# Altium PCB PCB1.PcbDoc
Units mil, origin at the board's own origin, x right, y up, seen from the top; angles counter-clockwise.
Board outline 6000 x 4000 mil, 6 copper layers (Top Layer, GND, SRAM_Bus, Power, GND_2, Bottom Layer), stack 28.052 mil thick; 52 components, 120 nets, 722 pads, 84 vias.
Unrouted connection lines stored in the file: 32.
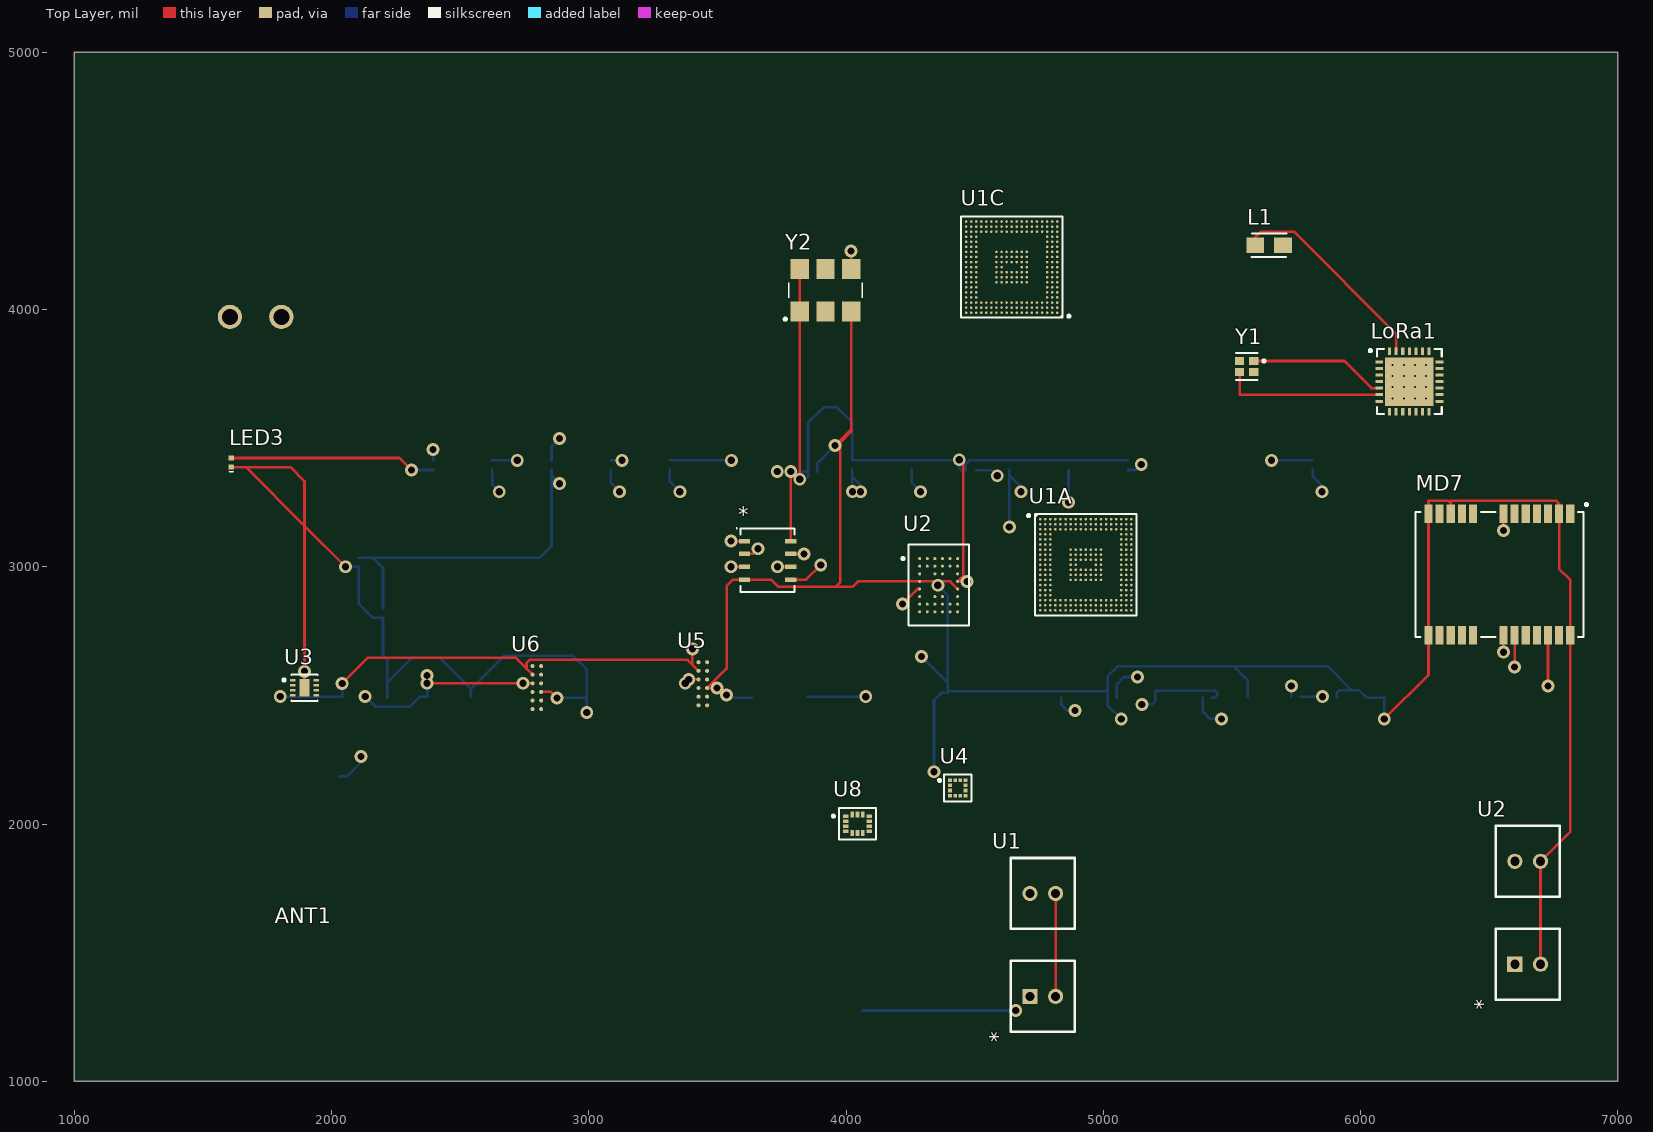
[diagram p0: Top Layer view]
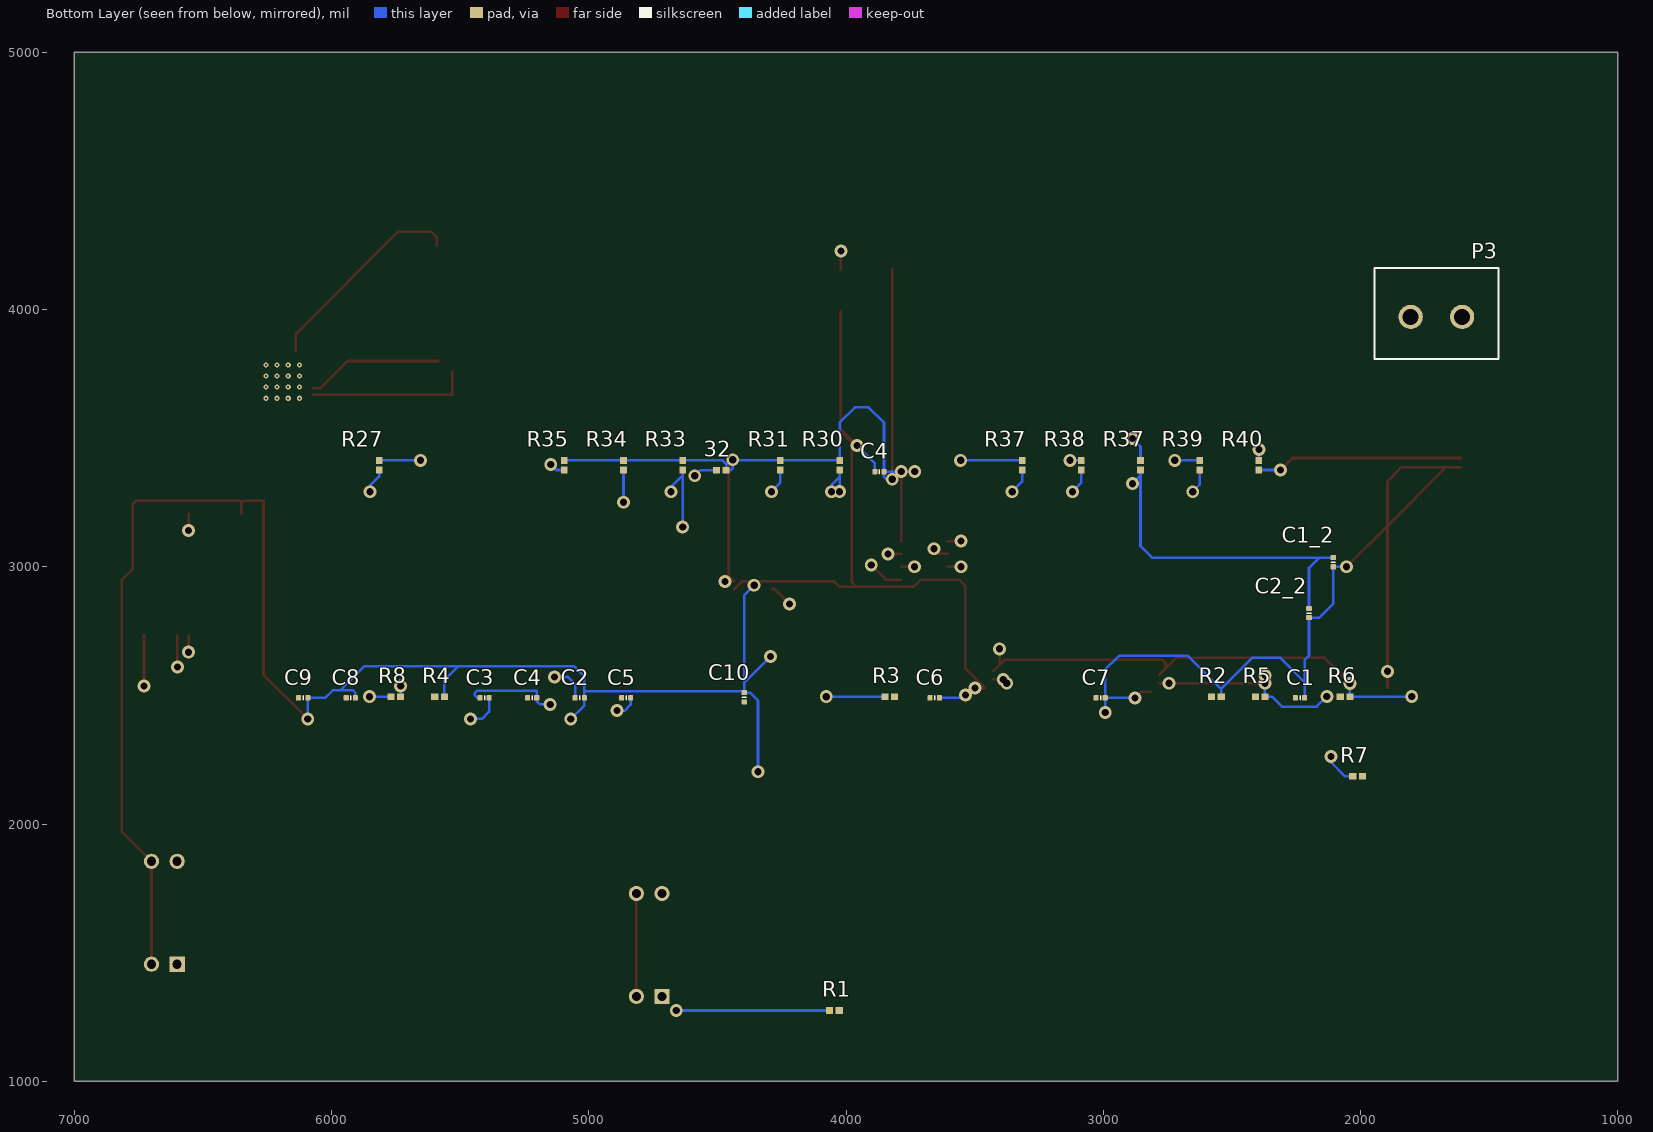
[diagram p1: Bottom Layer view, seen from below]
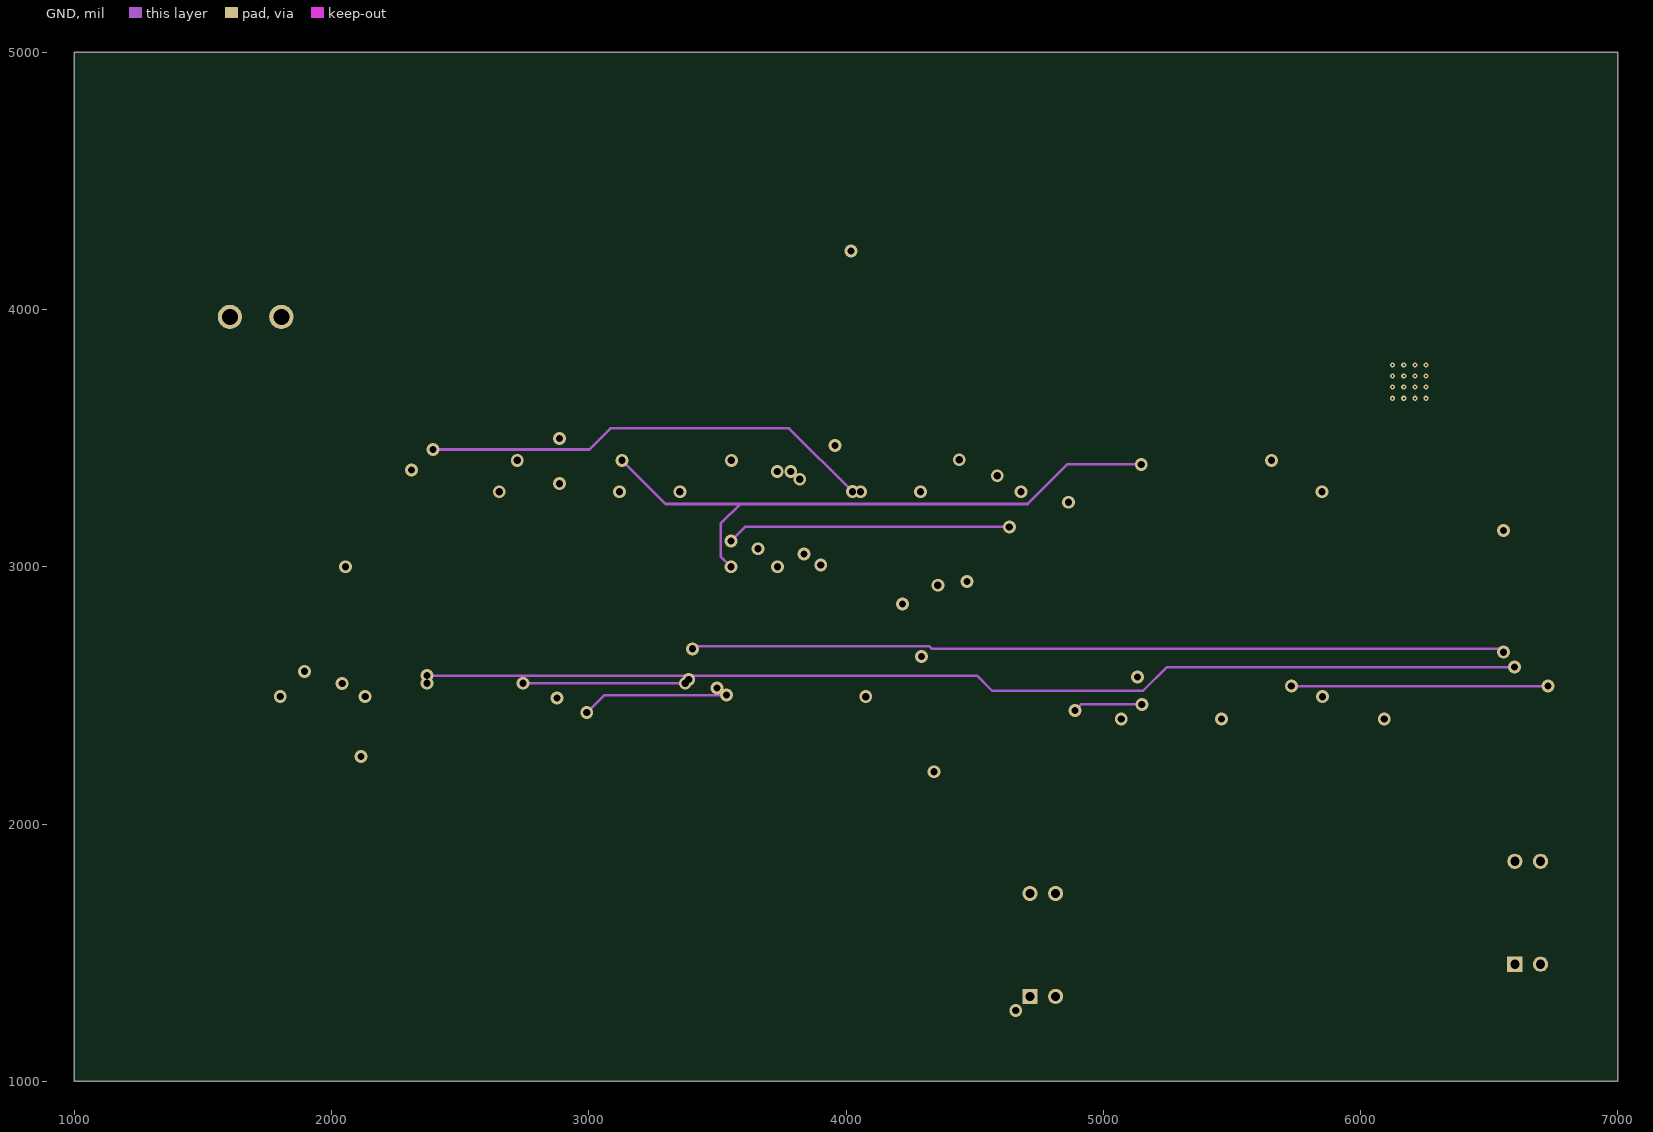
[diagram p2: GND]
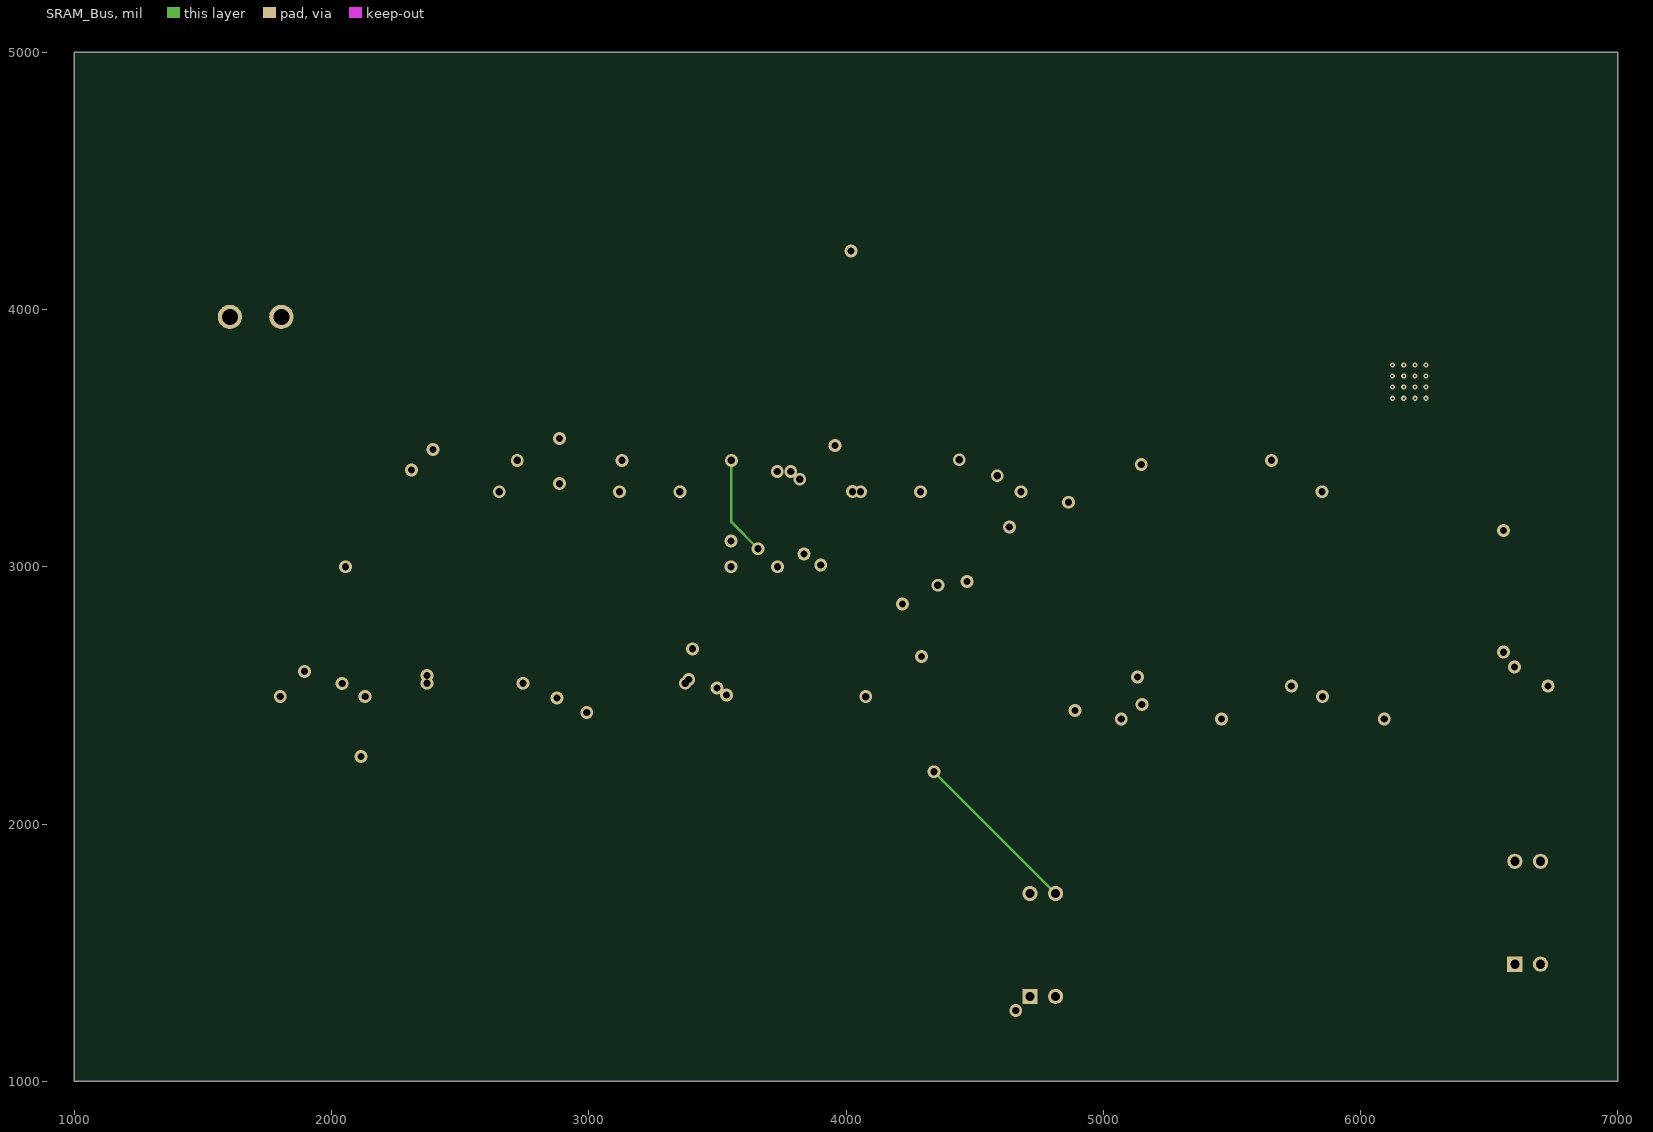
[diagram p3: SRAM_Bus]
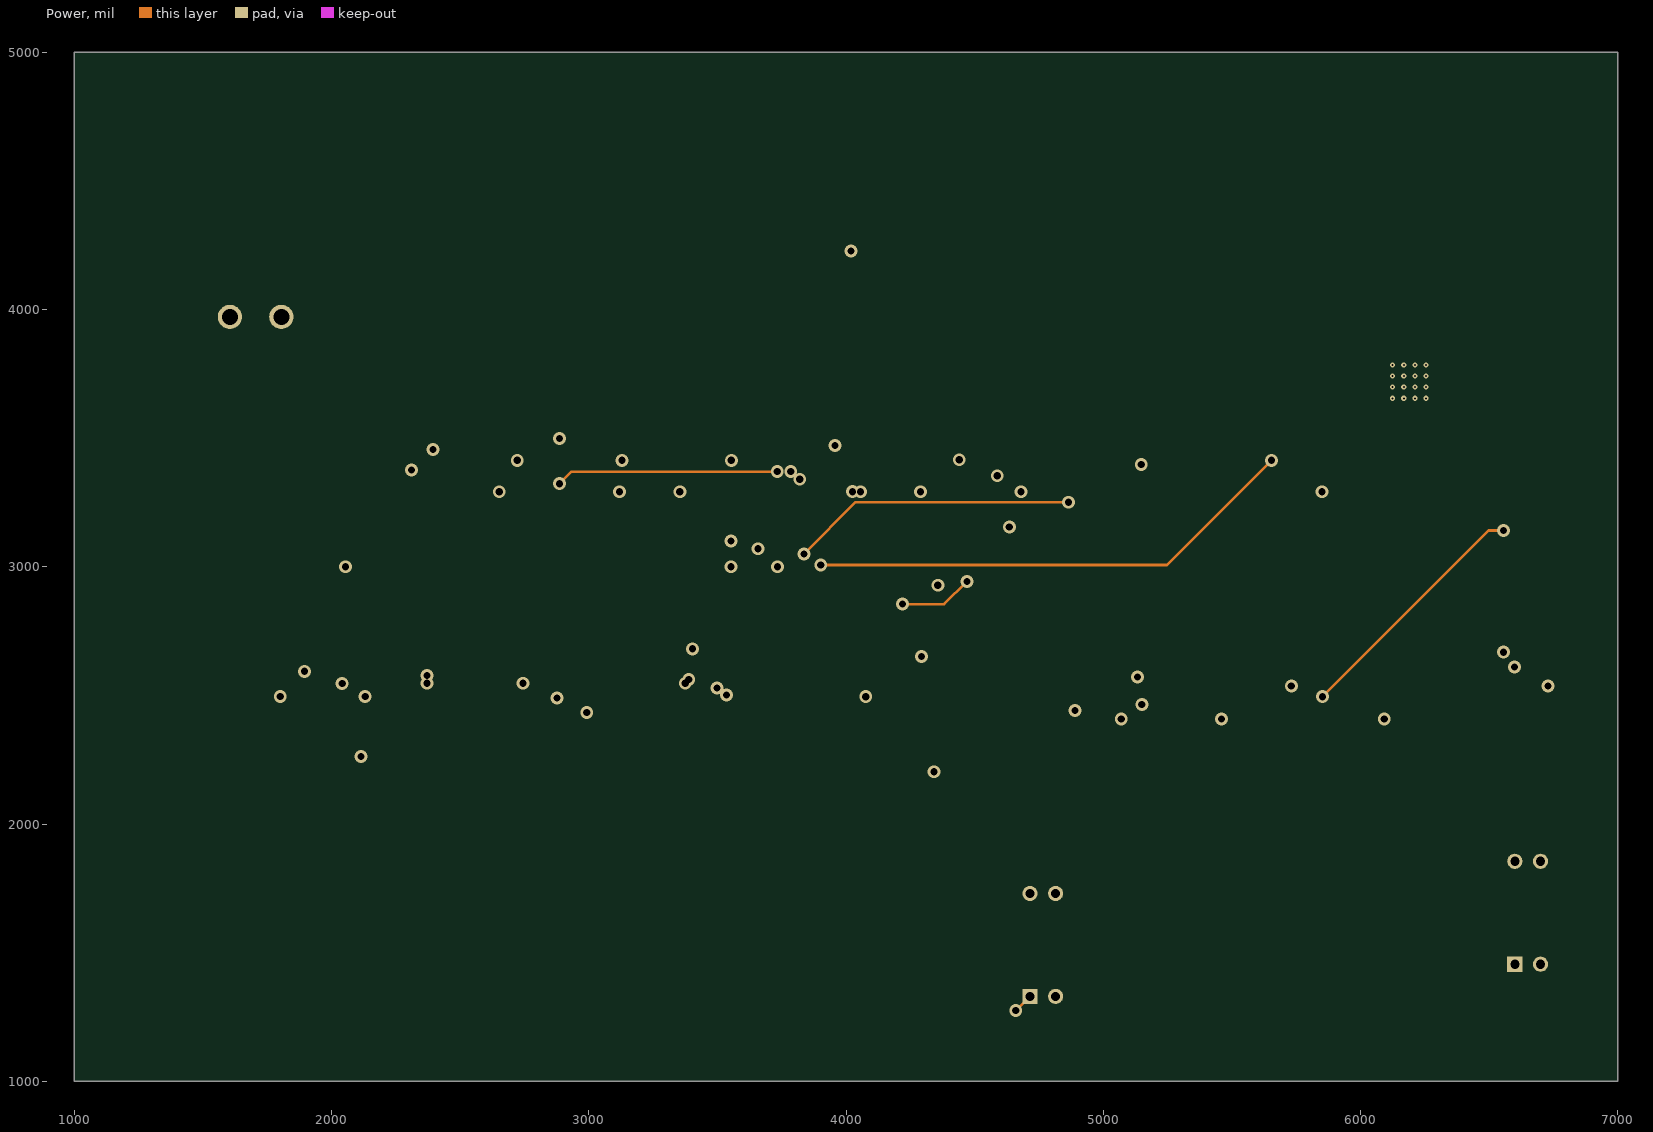
[diagram p4: Power]
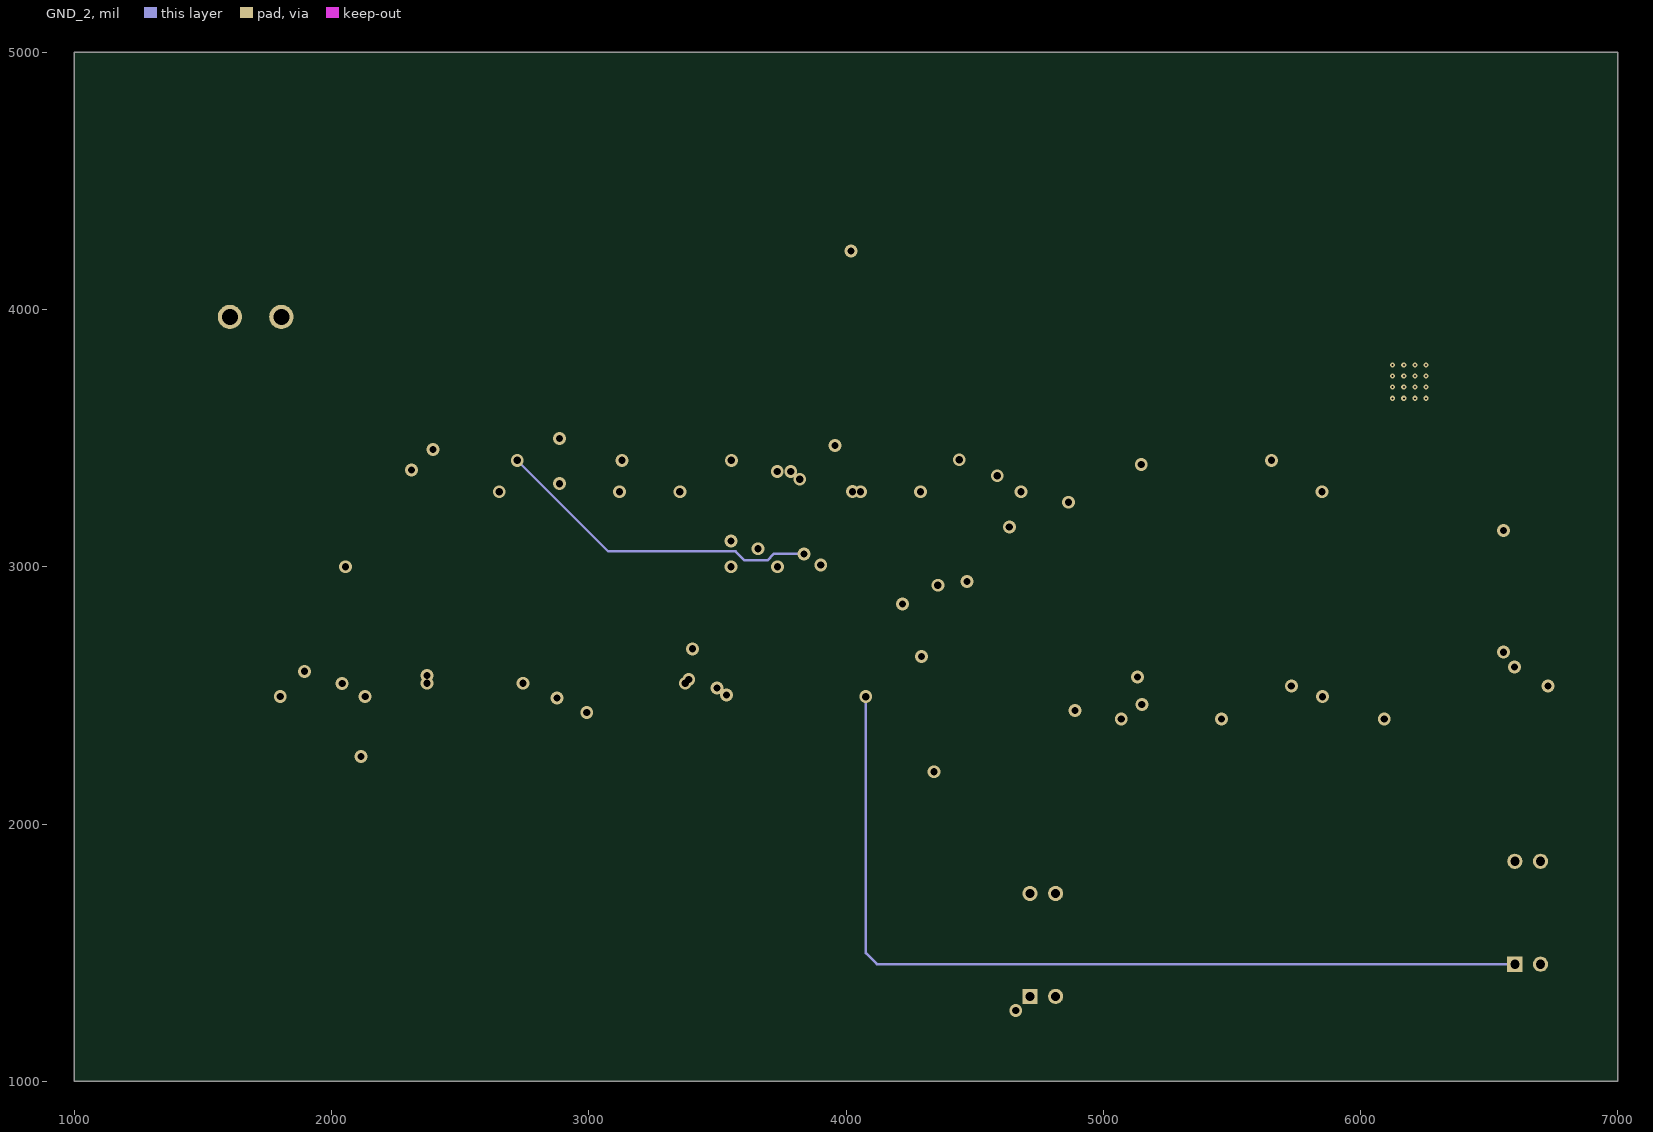
[diagram p5: GND_2]
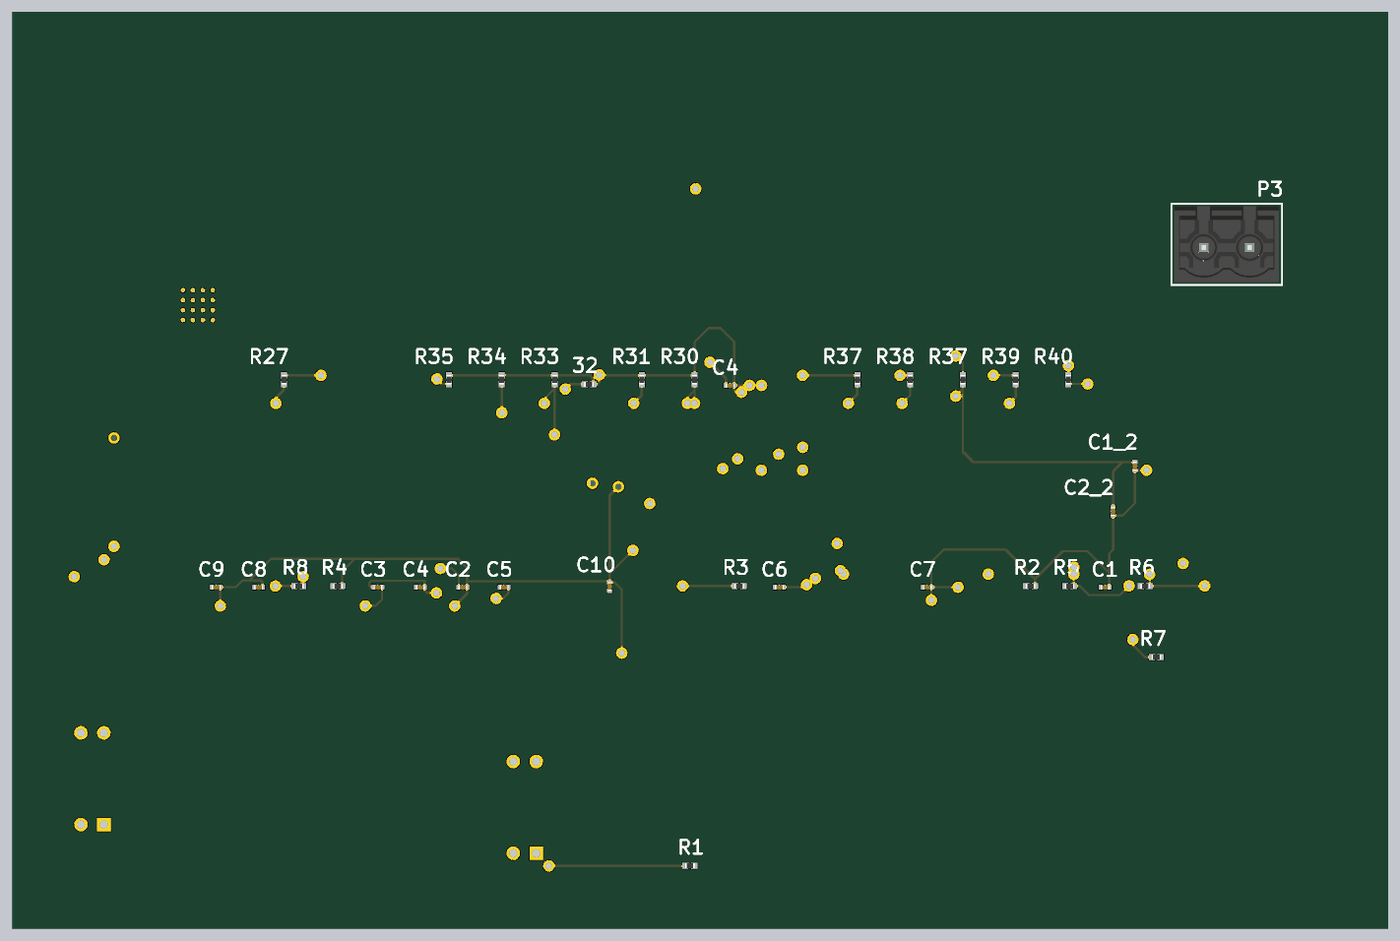
[diagram p6: 3D render of the assembled board from below, using the file's embedded part models]

## Layer stack, top to bottom
Top Solder: solder mask 0.4, Solder Resist, Dk 3.5
Top Layer: signal copper 0.7087
Dielectric 4: prepreg 2.8, FR-4, Dk 4.1
GND: signal copper 0.7087
Dielectric 2: prepreg 2.8, FR-4, Dk 4.1
SRAM_Bus: signal copper 0.7087
Dielectric 1: dielectric 12.6, FR-4, Dk 4.8
Power: signal copper 0.7087
Dielectric 3: prepreg 2.8, FR-4, Dk 4.1
GND_2: signal copper 0.7087
Dielectric 5: prepreg 2.8, FR-4, Dk 4.1
Bottom Layer: signal copper 0.7087
Bottom Solder: solder mask 0.4, Solder Resist, Dk 3.5

## Board outline
1000,1000 7000,1000 7000,5000 1000,5000

## Design rules (kind name [scope] priority, off if disabled: settings)
Clearance [All] p1: gap=10 ignorepadtopadclearanceinfootprint=FALSE
PolygonConnect [All] p1: connectstyle=Relief reliefconductorwidth=10 reliefentries=4 polygonreliefangle="90 Angle" airgapwidth=10
RoutingVias [All] p1: holewidth=28 width=50 viastyle="Through Hole" minholewidth=28 minwidth=50 maxholewidth=28 maxwidth=50
SolderMaskExpansion [All] p1: expansion=4 istentingtop=FALSE
SupplyNets "Schematic Supply Nets_5" [InNet('VCC3V3')] p1: voltage=0.000
SupplyNets "Schematic Supply Nets_4" [InNet('XADCGND')] p2: voltage=0.000
SupplyNets "Schematic Supply Nets_3" [InNet('VCC')] p3: voltage=0.000
SupplyNets "Schematic Supply Nets_2" [InNet('VCC_IO')] p4: voltage=0.000
SupplyNets "Schematic Supply Nets_1" [InNet('GND')] p5: voltage=0.000
SupplyNets "Schematic Supply Nets" [InNet('VCC3V3')] p6: voltage=0.000
Width [All] p1: maxlimit=10 minlimit=10 preferedwidth=10
30 further rules are at their usual default settings.

## Classes and differential pairs
component class Main_TopSheet: Y2
component class Designator: C15 C16 C17 C18 D1 D2 D3 D4 D5 D6 D7 P1 P2 P3 P4 P5 P6 R10 R11 R12 R13 R14 U9 U10

## Components (designator, comment, footprint, x,y, rotation, side; value= is the part's Value field where it differs from the comment)
32 "Resistor 51k +/-5% 0402 63 mW" RESC1005X40X25ML05T10 4485,3375 r180 bottom value=4.7K
* "MX25L3233FZBI-08GTR" SON127P500X80_HS-9N 3695,3025 r0 top
ANT1 "RN-SMA-4" FP-RN-SMA-4-MFG 1975,1380 r0 top (schematic designator ANT?)
C1 "Capacitor 100nF +/-20% 10V 0402" CAPC0402(1005)60_L 2235,2490 r180 bottom value=100nF
C1_2 "Capacitor 100nF +/-20% 10V 0402" CAPC0402(1005)60_L 2105,3017.72 r90 bottom value=100nF
C2 "Capacitor 100nF +/-20% 10V 0402" CAPC0402(1005)60_L 5035,2490 r180 bottom value=220nF
C2_2 "Capacitor 100nF +/-20% 10V 0402" CAPC0402(1005)60_L 2200,2820 r90 bottom value=100nF
C3 "Capacitor 100nF +/-20% 10V 0402" CAPC0402(1005)60_L 5405,2490 r180 bottom value=100nF
C4 "Capacitor 100nF +/-20% 10V 0402" CAPC0402(1005)60_L 5220,2490 r180 bottom value=10uF
C4 "Capacitor 100nF +/-20% 10V 0402" CAPC0402(1005)60_L 3870,3370 r180 bottom value=100nF
C5 "Capacitor 100nF +/-20% 10V 0402" CAPC0402(1005)60_L 4855,2490 r180 bottom value=100nF
C6 "Capacitor 100nF +/-20% 10V 0402" CAPC0402(1005)60_L 3655,2490 r180 bottom value=100nF
C7 "Capacitor 100nF +/-20% 10V 0402" CAPC0402(1005)60_L 3010,2490 r180 bottom value=100nF
C8 "Capacitor 100nF +/-20% 10V 0402" CAPC0402(1005)60_L 5925,2490 r180 bottom value=100nF
C9 "Capacitor 100nF +/-20% 10V 0402" CAPC0402(1005)60_L 6110,2490 r180 bottom value=100nF
C10 "Capacitor 100nF +/-20% 10V 0402" CAPC0402(1005)60_L 4395,2492.72 r90 bottom value=100nF
L1 "LQW31HN27NJ03L" FP-LQW31HN_03-MFG 5645,4250 r0 top
LED3 "QBLP595-IB" QTB-QBLP595_V 1610,3405 r90 top
LoRa1 "SX1276IMLTRT" SMTC-QFN-28_V 6190,3720 r0 top
MD7 "NEO-M9N-00B" FP-NEO-M9N-00B-MFG 6540,2970 r0 top
P3 "691701510002B" 691701510002B 1705,3985 r180 bottom
R1 "Resistor 51k +/-5% 0402 63 mW" RESC1005X40X25ML05T10 4045,1275 r180 bottom value=220
R2 "Resistor 51k +/-5% 0402 63 mW" RESC1005X40X25ML05T10 2560,2495 r180 bottom value=4.7K
R3 "Resistor 51k +/-5% 0402 63 mW" RESC1005X40X25ML05T10 3830,2495 r180 bottom value=220
R4 "Resistor 51k +/-5% 0402 63 mW" RESC1005X40X25ML05T10 5580,2495 r180 bottom value=4.7K
R5 "Resistor 51k +/-5% 0402 63 mW" RESC1005X40X25ML05T10 2390,2495 r180 bottom value=4.7K
R6 "Resistor 51k +/-5% 0402 63 mW" RESC1005X40X25ML05T10 2060,2495 r180 bottom value=4.7K
R7 "Resistor 51k +/-5% 0402 63 mW" RESC1005X40X25ML05T10 2011.3,2185 r180 bottom value=10K
R8 "Resistor 51k +/-5% 0402 63 mW" RESC1005X40X25ML05T10 5750,2495 r180 bottom value=220
R27 "Resistor 51k +/-5% 0402 63 mW" RESC1005X40X25ML05T10 5815,3395 r90 bottom value=100
R30 "Resistor 51k +/-5% 0402 63 mW" RESC1005X40X25ML05T10 4025,3395 r90 bottom value=200
R31 "Resistor 51k +/-5% 0402 63 mW" RESC1005X40X25ML05T10 4255,3395 r90 bottom value=4.7K
R33 "Resistor 51k +/-5% 0402 63 mW" RESC1005X40X25ML05T10 4635,3395 r90 bottom value=4.7K
R34 "Resistor 51k +/-5% 0402 63 mW" RESC1005X40X25ML05T10 4865,3395 r90 bottom value=1.8K
R35 "Resistor 51k +/-5% 0402 63 mW" RESC1005X40X25ML05T10 5095,3395 r90 bottom value=1.8K
R37 "Resistor 51k +/-5% 0402 63 mW" RESC1005X40X25ML05T10 3315,3395 r90 bottom value=100
R37 "Resistor 51k +/-5% 0402 63 mW" RESC1005X40X25ML05T10 2855,3395 r90 bottom value=4.7K
R38 "Resistor 51k +/-5% 0402 63 mW" RESC1005X40X25ML05T10 3085,3395 r90 bottom value=100
R39 "Resistor 51k +/-5% 0402 63 mW" RESC1005X40X25ML05T10 2625,3395 r90 bottom value=100
R40 "Resistor 51k +/-5% 0402 63 mW" RESC1005X40X25ML05T10 2395,3395 r90 bottom value=100
U1 "TCST2103" TCST2103-Footprint-1 4889.02,1192.2 r90 top
U1A "XC7A35T-1CPG236C" BGA81C50P19X19_1000X1000X110 4932.2,3007.8 r0 top
U1C "XC7A35T-1CPG236C" BGA81C50P19X19_1000X1000X110 4644.06,4165 r180 top
U2 "IS61WV5128BLL-10BLI" FP-IS61WV5128BLL-10BLI-IPC_A 4360.24,2928.35 r0 top
U2 "TCST2103" TCST2103-Footprint-1 6774.02,1317.2 r90 top
U3 "SHT30-DIS-B2.5KS" FP-SHT30-DIS-B2_5KS-MFG 1895,2530 r0 top
U4 "LSM303AGRTR" FP-LGA-12-8487206-MFG 4434.84,2140.02 r0 top
U5 "MPRLS0030PA00001A" LGA12C85P2X6_500X500X150 3443.27,2545.2 r0 top
U6 "MPRLS0030PA00001A" LGA12C85P2X6_500X500X150 2798.27,2530.2 r0 top
U8 "LSM6DSOXTR" FP-LGA-14L-DM00249496-MFG 4044.68,2000.93 r0 top
Y1 "" FP-ABM11AIG-MFG 5557.44,3778.35 r180 top
Y2 "XLH735100.000000X" JU6_MFG 3920,4075 r90 top

## Footprints (in the part's own frame and the unit in brackets; to place one, negate y for a bottom-side part, rotate by r counter-clockwise, add the part's x,y. Pads: shape width x height; smd on the part's side, far side on the other; paste and mask are expansions set on the pad)
691701510002B [mm] "THR - 5,08mm - PCB Vertical Close - 02p"
  round 2.4 hole 1.6: 1(-2.54,-0.35) 2(2.54,-0.35)
  silkscreen extent -6.13,-4.5 6.13,4.5, body extent -5.78,-4.25 5.78,4.25, height 12.1
BGA81C50P19X19_1000X1000X110 [mm] "BGA, 81-Leads, Body 10,00x10,00mmx1,10mm, Pitch 0,50mm"
  round 0.25 smd: A1(-4.5,4.5) A2(-4,4.5) A3(-3.5,4.5) A4(-3,4.5) A5(-2.5,4.5) A6(-2,4.5) A7(-1.5,4.5) A8(-1,4.5) A9(-0.5,4.5) A10(0,4.5) A11(0.5,4.5) A12(1,4.5) A13(1.5,4.5) A14(2,4.5) A15(2.5,4.5) A16(3,4.5) A17(3.5,4.5) A18(4,4.5) A19(4.5,4.5) B1(-4.5,4) B2(-4,4) B3(-3.5,4) B4(-3,4) B5(-2.5,4) B6(-2,4) B7(-1.5,4) B8(-1,4) B9(-0.5,4) B10(0,4) B11(0.5,4) B12(1,4) B13(1.5,4) B14(2,4) B15(2.5,4) B16(3,4) B17(3.5,4) B18(4,4) B19(4.5,4) C1(-4.5,3.5) C2(-4,3.5) C3(-3.5,3.5) C4(-3,3.5) C5(-2.5,3.5) C6(-2,3.5) C7(-1.5,3.5) C8(-1,3.5) C9(-0.5,3.5) C10(0,3.5) C11(0.5,3.5) C12(1,3.5) C13(1.5,3.5) C14(2,3.5) C15(2.5,3.5) C16(3,3.5) C17(3.5,3.5) C18(4,3.5) C19(4.5,3.5) D1(-4.5,3) D2(-4,3) D3(-3.5,3) D17(3.5,3) D18(4,3) D19(4.5,3) E1(-4.5,2.5) E2(-4,2.5) E3(-3.5,2.5) E17(3.5,2.5) E18(4,2.5) E19(4.5,2.5) F1(-4.5,2) F2(-4,2) F3(-3.5,2) F17(3.5,2) F18(4,2) F19(4.5,2) G1(-4.5,1.5) G2(-4,1.5) G3(-3.5,1.5) G7(-1.5,1.5) G8(-1,1.5) G9(-0.5,1.5) G10(0,1.5) G11(0.5,1.5) G12(1,1.5) G13(1.5,1.5) G17(3.5,1.5) G18(4,1.5) G19(4.5,1.5) H1(-4.5,1) H2(-4,1) H3(-3.5,1) H7(-1.5,1) H8(-1,1) H9(-0.5,1) H10(0,1) H11(0.5,1) H12(1,1) H13(1.5,1) H17(3.5,1) H18(4,1) H19(4.5,1) J1(-4.5,0.5) J2(-4,0.5) J3(-3.5,0.5) J7(-1.5,0.5) J8(-1,0.5) J9(-0.5,0.5) J10(0,0.5) J11(0.5,0.5) J12(1,0.5) J13(1.5,0.5) J17(3.5,0.5) J18(4,0.5) J19(4.5,0.5) K1(-4.5,0) K2(-4,0) K3(-3.5,0) K7(-1.5,0) K8(-1,0) K12(1,0) K13(1.5,0) K17(3.5,0) K18(4,0) K19(4.5,0) L1(-4.5,-0.5) L2(-4,-0.5) L3(-3.5,-0.5) L7(-1.5,-0.5) L8(-1,-0.5) L9(-0.5,-0.5) L10(0,-0.5) L11(0.5,-0.5) L12(1,-0.5) L13(1.5,-0.5) L17(3.5,-0.5) L18(4,-0.5) L19(4.5,-0.5) M1(-4.5,-1) M2(-4,-1) M3(-3.5,-1) M7(-1.5,-1) M8(-1,-1) M9(-0.5,-1) M10(0,-1) M11(0.5,-1) M12(1,-1) M13(1.5,-1) M17(3.5,-1) M18(4,-1) M19(4.5,-1) N1(-4.5,-1.5) N2(-4,-1.5) N3(-3.5,-1.5) N7(-1.5,-1.5) N8(-1,-1.5) N9(-0.5,-1.5) N10(0,-1.5) N11(0.5,-1.5) N12(1,-1.5) N13(1.5,-1.5) N17(3.5,-1.5) N18(4,-1.5) N19(4.5,-1.5) P1(-4.5,-2) P2(-4,-2) P3(-3.5,-2) P17(3.5,-2) P18(4,-2) P19(4.5,-2) R1(-4.5,-2.5) R2(-4,-2.5) R3(-3.5,-2.5) R17(3.5,-2.5) R18(4,-2.5) R19(4.5,-2.5) T1(-4.5,-3) T2(-4,-3) T3(-3.5,-3) T17(3.5,-3) T18(4,-3) T19(4.5,-3) U1(-4.5,-3.5) U2(-4,-3.5) U3(-3.5,-3.5) U4(-3,-3.5) U5(-2.5,-3.5) U6(-2,-3.5) U7(-1.5,-3.5) U8(-1,-3.5) U9(-0.5,-3.5) U10(0,-3.5) U11(0.5,-3.5) U12(1,-3.5) U13(1.5,-3.5) U14(2,-3.5) U15(2.5,-3.5) U16(3,-3.5) U17(3.5,-3.5) U18(4,-3.5) U19(4.5,-3.5) V1(-4.5,-4) V2(-4,-4) V3(-3.5,-4) V4(-3,-4) V5(-2.5,-4) V6(-2,-4) V7(-1.5,-4) V8(-1,-4) V9(-0.5,-4) V10(0,-4) V11(0.5,-4) V12(1,-4) V13(1.5,-4) V14(2,-4) V15(2.5,-4) V16(3,-4) V17(3.5,-4) V18(4,-4) V19(4.5,-4) W1(-4.5,-4.5) W2(-4,-4.5) W3(-3.5,-4.5) W4(-3,-4.5) W5(-2.5,-4.5) W6(-2,-4.5) W7(-1.5,-4.5) W8(-1,-4.5) W9(-0.5,-4.5) W10(0,-4.5) W11(0.5,-4.5) W12(1,-4.5) W13(1.5,-4.5) W14(2,-4.5) W15(2.5,-4.5) W16(3,-4.5) W17(3.5,-4.5) W18(4,-4.5) W19(4.5,-4.5)
  silkscreen extent -5.77,-5 5,5, body extent -5,-5 5,5, height 1.1
CAPC0402(1005)60_L [mm] "Chip Capacitor, Body 1.0x0.5mm, Height 0.6mm, IPC High Density"
  rrect25% 0.5x0.55 smd: 1(-0.45,0) 2(0.45,0)
  silkscreen extent 0,-0.2 0,0.2, body extent -0.5,-0.25 0.5,0.25, height 0.6
FP-ABM11AIG-MFG [mm]
  rect 0.9x0.8 smd paste+0 mask+0: 1(-0.7,-0.55) 2(0.7,-0.55) 3(0.7,0.55) 4(-0.7,0.55)
  silkscreen extent -1.83,-1.35 1.05,1.35, body extent -1.25,-1.05 1.25,1.05, height 0.25
FP-IS61WV5128BLL-10BLI-IPC_A [mm]
  round 0.298 smd paste+0 mask+0: A1(-1.875,2.625) A2(-1.125,2.625) A3(-0.375,2.625) A4(0.375,2.625) A5(1.125,2.625) A6(1.875,2.625) B1(-1.875,1.875) B2(-1.125,1.875) B3(-0.375,1.875) B4(0.375,1.875) B5(1.125,1.875) B6(1.875,1.875) C1(-1.875,1.125) C3(-0.375,1.125) C4(0.375,1.125) C6(1.875,1.125) D1(-1.875,0.375) D6(1.875,0.375) E1(-1.875,-0.375) E6(1.875,-0.375) F1(-1.875,-1.125) F3(-0.375,-1.125) F4(0.375,-1.125) F6(1.875,-1.125) G1(-1.875,-1.875) G2(-1.125,-1.875) G3(-0.375,-1.875) G4(0.375,-1.875) G5(1.125,-1.875) G6(1.875,-1.875) H1(-1.875,-2.625) H2(-1.125,-2.625) H3(-0.375,-2.625) H4(0.375,-2.625) H5(1.125,-2.625) H6(1.875,-2.625)
  silkscreen extent -3.65,-4 3,4, body extent -3.5,-4.5 3.5,4.5, height 0.25
FP-LGA-12-8487206-MFG [mm]
  rect 0.375x0.35 smd paste+0 mask+0: 1(-0.763,0.75) 2(-0.763,0.25) 3(-0.763,-0.25) 4(-0.763,-0.75) 7(0.762,-0.75) 8(0.762,-0.25) 9(0.762,0.25) 10(0.762,0.75)
  rect 0.35x0.375 smd paste+0 mask+0: 5(-0.25,-0.763) 6(0.25,-0.763) 11(0.25,0.763) 12(-0.25,0.763)
  silkscreen extent -1.92,-1.35 1.35,1.35, body extent -1.55,-1.55 1.55,1.55, height 0.25
FP-LGA-14L-DM00249496-MFG [mm]
  rect 0.575x0.35 smd paste+0 mask+0: 1(-1.162,0.75) 2(-1.162,0.25) 3(-1.162,-0.25) 4(-1.162,-0.75) 8(1.162,-0.75) 9(1.162,-0.25) 10(1.162,0.25) 11(1.162,0.75)
  rect 0.35x0.575 smd paste+0 mask+0: 5(-0.5,-0.913) 6(0,-0.913) 7(0.5,-0.913) 12(0.5,0.912) 13(0,0.912) 14(-0.5,0.912)
  silkscreen extent -2.5,-1.57 1.83,1.58, body extent -2.05,-1.8 2.05,1.8, height 0.25
FP-LQW31HN_03-MFG [mm]
  rect 1.75x1.5 smd paste+0 mask+0: 1(-1.375,0) 2(1.375,0)
  silkscreen extent -1.75,-1.17 1.7,1.18, body extent -2.35,-1 2.35,1, height 0.25
FP-NEO-M9N-00B-MFG [mm]
  rect 0.8x1.8 smd paste-1000 mask-1000: 1(7,6) 2(5.9,6) 3(4.8,6) 4(3.7,6) 5(2.6,6) 6(1.5,6) 7(0.4,6) 8(-2.6,6) 9(-3.7,6) 10(-4.8,6) 11(-5.9,6) 12(-7,6) 13(-7,-6) 14(-5.9,-6) 15(-4.8,-6) 16(-3.7,-6) 17(-2.6,-6) 18(0.4,-6) 19(1.5,-6) 20(2.6,-6) 21(3.7,-6) 22(4.8,-6) 23(5.9,-6) 24(7,-6)
  silkscreen extent -8.3,-6.15 8.73,7.02, body extent -8.4,-7.4 8.4,7.4, height 0.25
FP-RN-SMA-4-MFG [mil]
  body extent -201,-201 201,201, height 10
FP-SHT30-DIS-B2_5KS-MFG [mm]
  rect 0.55x0.25 smd paste-1000 mask-1000: 1(-1.175,0.75) 2(-1.175,0.25) 3(-1.175,-0.25) 4(-1.175,-0.75) 5(1.175,-0.75) 6(1.175,-0.25) 7(1.175,0.25) 8(1.175,0.75)
  rect 1x1.7 smd paste-1000 mask+0: 9(0,0)
  silkscreen extent -2.15,-1.3 1.3,1.3, body extent -1.65,-1.4 1.65,1.4, height 0.25
JU6_MFG [mm] "Recommended Land Pattern"
  rect 2x1.8 smd paste+0 mask+0: 1(-2.1,2.54) 2(-2.1,0) 3(-2.1,-2.54) 4(2.1,-2.54) 5(2.1,0) 6(2.1,2.54)
  silkscreen extent -2.97,-3.64 0.73,4.09, body extent -2.5,-3.5 2.5,3.5, height 1.45
LGA12C85P2X6_500X500X150 [mm] "LGA, 12-Leads, Body 5,00x5,00mmx1,50mm, Pitch 0,85mm"
  round 0.4 smd: 1(-0.425,2.125) 2(-0.425,1.275) 3(-0.425,0.425) 4(-0.425,-0.425) 5(-0.425,-1.275) 6(-0.425,-2.125) 7(0.425,2.125) 8(0.425,1.275) 9(0.425,0.425) 10(0.425,-0.425) 11(0.425,-1.275) 12(0.425,-2.125)
  body extent -2.5,-2.5 2.5,2.5, height 1.5
QTB-QBLP595_V [mm] "SMD, 2-Leads, Body 1x0.5mm"
  rrect25% 0.5x0.55 smd: 1(-0.455,0) 2(0.455,0)
  silkscreen extent -0.9,-0.2 -0.9,0.2, body extent -0.5,-0.25 0.5,0.25, height 0.5
RESC1005X40X25ML05T10 [mm] "Chip Resistor, 2-Leads, Body 1.05x0.55mm, IPC Low Density"
  rect 0.7x0.65 smd: 1(-0.475,0) 2(0.475,0)
  body extent -0.53,-0.28 0.53,0.28, height 0.4
SMTC-QFN-28_V [mm] "QFN, 28-Leads, Body 6.1x6.1mm, Pitch 0.65mm, Thermal Pad 4.8x4.8mm"
  rect 0.75x0.3 smd: 1(-2.975,1.95) 2(-2.975,1.3) 3(-2.975,0.65) 4(-2.975,0) 5(-2.975,-0.65) 6(-2.975,-1.3) 7(-2.975,-1.95) 15(2.975,-1.95) 16(2.975,-1.3) 17(2.975,-0.65) 18(2.975,0) 19(2.975,0.65) 20(2.975,1.3) 21(2.975,1.95)
  rect 0.3x0.75 smd: 8(-1.95,-2.975) 9(-1.3,-2.975) 10(-0.65,-2.975) 11(0,-2.975) 12(0.65,-2.975) 13(1.3,-2.975) 14(1.95,-2.975) 22(1.95,2.975) 23(1.3,2.975) 24(0.65,2.975) 25(0,2.975) 26(-0.65,2.975) 27(-1.3,2.975) 28(-1.95,2.975)
  rect 4.8x4.8 smd: 29(0,0)
  silkscreen extent -3.97,-3.2 3.2,3.2, body extent -3.05,-3.05 3.05,3.05, height 1
SON127P500X80_HS-9N [mm] "SON, 8-Leads, Body 6,00x5,00mm, Pitch 1,27mm, Thermal Pad 0,00x0,00mm, IPC Medium Density"
  rect 1.1x0.45 smd: 1(-2.29,1.905) 2(-2.29,0.635) 3(-2.29,-0.635) 4(-2.29,-1.905) 5(2.29,-1.905) 6(2.29,-0.635) 7(2.29,0.635) 8(2.29,1.905)
  silkscreen extent -3.1,-3.15 2.65,3.2, body extent -2.5,-3 2.5,3, height 0.8
TCST2103-Footprint-1 [mm]
  rect 1.5x1.5 hole 0.9: 1(3.5,4.42)
  round 1.5 hole 0.9: 2(3.5,1.88) 3(13.66,4.42) 4(13.66,1.88)
  silkscreen extent 0,0 17.16,6.3

## Part data
32 R1 R2 R3 R4 R5 R6 R7 R8 R27 R30 R31 R33 R34 R35 R37 R37 R38 R39 R40: library part CMP-009-00000-5, "Chip Resistor, 51 KOhm, +/- 5%, 0.063 W, -55 to 155 degC, 0402 (1005 Metric)", Case/Package=0402, Max Operating Temperature=155°C, Min Operating Temperature=-55°C, Power=63mW, Tolerance=5%, Mounting Technology=SM, Pins=2, RoHS Compliant=True
*: library part CMP-020-00028-1, "NOR Flash Serial-3Wire 3V 32Mbit 32M/16M/8M x 1Bit/2Bit/4Bit 8-Pin USON T/R"
ANT1: library part CMP-06329-000002-1, "RF ANT 2.4GHZ WHIP SMA MALE 4\"", Case/Package=SMA, Frequency=2.45GHz, Package Quantity=1, Bandwidth=120MHz, Connector Type=SMA, Height=4.449inch, Impedance=50R, Input Impedance=50R, Lead Free="Lead Free", Mount=Connector, Number of Bands=1, Packaging=Bulk, Radiation Hardening=No, REACH SVHC="No SVHC", Series=-, Termination=SMA, VSWR=1.9
C1 C1_2 C2 C2_2 C3 C4 C4 C5 C6 C7 C8 C9 C10: library part CMP-001-00061-3, "Chip Capacitor, 100nF +/-20%, 10V, 0402, Thickness 0.6 mm", Case/Package=0402, Max Operating Temperature=85°C, Min Operating Temperature=-55°C, Tolerance=20%, Voltage Rating=10V, Mounting Technology=SMT, Pins=2
L1: library part CMP-06042-006372-1, "Wire Wound RF Inductor 27nH ±5% 0.0714Ω 560mA 1206", Case Code (Imperial)=1206, Case Code (Metric)=3216, Current Rating=560mA, DC Resistance (DCR)=51mR, Inductance=27nH, Max Operating Temperature=85°C, Min Operating Temperature=-40°C, Package Quantity=2000, Resistor Type=Wirewound, Self Resonant Frequency=1GHz, Test Frequency=100MHz, Tolerance=5%, Case/Package=1206, Core Material=Ferrite, DC Current=560mA, Depth=1.8mm, Height=1.8mm, Height - Seated (Max)=0.079inch, Length=3.2mm, Max DC Current=560mA, Military Standard=Not, Mount="Surface Mount", Packaging="Tape and Reel", Q Factor=60, Radiation Hardening=No, Shielding=Unshielded, Termination=SMD/SMT, Weight=0.000705oz, Width=0.063inch
LED3: library part CMP-007-00042-3, "Chip LED 0402, Blue, 0.02 A, 3.1 to 3.7 V, -40 to 80 degC, 2-Pin SMD, RoHS, Tape and Reel", Case/Package=0402, Colour=Blue, Mounting Technology=SMT, Pins=2, RoHS Compliant=Yes
LoRa1: library part CMP-2000-05356-1, "Low Power Long Range Transceiver, 137 to 1020 MHz, -40 to 85 degC, 28-Pin QFN, RoHS, Tape and Reel", Current - Receiving=10.8mA~12mA, Current - Transmitting=20mA~120mA, Frequency=137MHz~1.02GHz, Manufacturer=Semtech, Operating Temperature=-40degC~85degC, Package / Case=28-VQFNExposedPad, Package Description="28-Pin Quad Flat No-lead Package, Body 6 x 6 mm, Pitch 0.65 mm", Package Reference=QFN-28, Power - Output=20dBm, Standard Package=3,000, Voltage - Supply=1.8V~3.7V, Category=RF/IFandRFID, Data Rate (Max)=300kbps, Datasheet URL=http://www.semtech.com/images/datasheet/sx1276.pdf, Datasheet Version="Rev. 4, 03/2015", Design Resources=SX127xReferenceDesignOverviewDevelopmentToolSelector, Family=RFTransceiverICs, Featured Product=SX1276LongRangeTransceiver, GPIO=6, Manufacturer URL=http://www.semtech.com/, Memory Size=-, Mfg Application Notes=LoRaModulation:CrystalOscillatorGuidanceSX12xxSoftwareImplementationofDataWhiteningandCRCSX127xLoRaLowEnergyDesignGuideSX127xLoRaModemDesignersGuide, Modulation=FSK,GFSK,GMSK,MSK,OOK, Online Catalog=SX1276,SX1277andSX1278, Other Names=SX1276IMLTRTTR, Packaging=Tape&Reel(TR), PCN Design/Specification=CopperWire25/Mar/2014, Protocol=LoRa™, RF Family/Standard=802.15.4, Sensitivity=-148dBm, Serial Interfaces=SPI, Series=-, Type=TxRx+MCU
MD7: library part CMP-207130-000006-2, "M9 standard precision module", Manufacturer=u-blox, Max Supply Voltage=3.6V, Min Supply Voltage=1.65V, Package=0, Temperature="-40°C to +85°C", Temperature Range High=+85°C, Temperature Range Low=-40°C, Automotive=No, Category=UNK, ComponentLink2Description=Datasheet, ComponentLink2URL=https://www.u-blox.com/sites/default/files/NEO-M9N_DataSheet_%28UBX-19014285%29.pdf, Device Class L1="Integrated Circuits (ICs)", Device Class L2="RF Semiconductors and Devices", Device Class L3="RF Receivers", Footprint Url=https://www.u-blox.com/sites/default/files/NEO-M9N_Integrationmanual_%28UBX-19014286%29.pdf, Height=2.6mm, Interface=I2C,SPI,UART,USB, Lead Free=Yes, Manufacturer Part Number=NEO-M9N-00B, Octopart=https://octopart.com/neo-m9n-00b-u-blox-107315722, RoHS=TRUE, Sensitivity=-167dBm
P3: library part CMP-1502-02329-3, "HEADER, 5.08MM, CLOSED SIDED, 2WAY; Connector Type: Terminal Block; Connector Mou", Color=Black, Current Rating=10A, Max Operating Temperature=105°C, Min Operating Temperature=-40°C, Voltage Rating=300V, Connector Type="Terminal Block", Contact Gender=Male, Contact Material=Brass, Contact Plating=Tin, Gender=Male, Housing Material=Polymer, Lead Pitch=5.08mm, Length=12.96mm, Mount="Through Hole", Number of Contacts=2, Number of Pins=2, Pitch=5.08mm, REACH SVHC=Unknown, RoHS=Compliant, Termination=PCB
U1 U2: library part CMP-010-00024-2, "Vishay TCST2103 CNY37 Photoelectric Fork Sensor Optoelectronic Sensing", Max Operating Temperature=85°C, Min Operating Temperature=-55°C, Output Current=100mA, Mounting Technology="Through Hole", Pins=4
U1A: library part CMP-020-00032-2, "FPGA Artix-7 Family 33280 Cells 28nm Technology 1V 236-Pin CSBGA", Case/Package=LFBGA, Clock Frequency=1.098GHz, Max Operating Temperature=85°C, Max Supply Voltage=1.05V, Min Operating Temperature=0°C, Min Supply Voltage=950mV, Pins=236, RAM Size=225kB
U1C: library part CMP-020-00032-4, "FPGA Artix-7 Family 33280 Cells 28nm Technology 1V 236-Pin CSBGA", Case/Package=LFBGA, Clock Frequency=1.098GHz, Max Operating Temperature=85°C, Max Supply Voltage=1.05V, Min Operating Temperature=0°C, Min Supply Voltage=950mV, Pins=236, RAM Size=225kB
U2: library part CMP-0513-00068-2, Ambient Temperature Range High=85°C, Case/Package=BGA, Max Supply Voltage=3.6V, Min Operating Temperature=-40°C, Min Supply Voltage=2.4V, Nominal Supply Current=40mA, Access Time=10ns, Address Bus Width=19b, Density=4Mb, Height=1.2mm, Interface=Parallel, Max Operating Temperature=85°C, Memory Size=512kB, Memory Type=SRAM, NexarPartId=11886108, Number of Pins=36, Number of Ports=1, Number of Words=512000, Radiation Hardening=No, RoHS=Compliant, Schedule B="8542320040, 8542320040", Sync/Async=Asynchronous, Word Size=8b
U3: library part CMP-144040-000006-1, "SENSOR HUMID/TEMP 5V I2C 3% SMD"
U4: library part CMP-2000-07465-2, "IMU ACCEL/MAG I2C/SPI 12LGA", Manufacturer=STMicroelectronics, Max Supply Voltage=3.6V, Min Supply Voltage=1.71V, Operating Supply Current=3.7-200uA, Package=LGA-12-8487206, Temperature="-40°C to +85°C", Temperature Range High=+85°C, Temperature Range Low=-40°C, Accel Range=2/4/8/16g, Accel Resolution=16bits, Automotive=No, Category=IC, ComponentLink2Description=Datasheet, ComponentLink2URL=https://www.st.com/resource/en/datasheet/lsm303agr.pdf, Device Class L1=Sensors, Device Class L2="Motion Sensors", Device Class L3="Inertial Measurement Units (IMUs)", Digikey Description="IMU ACCEL/MAG I2C/SPI 12LGA", Footprint Url=https://www.st.com/content/ccc/resource/technical/document/technical_note/73/17/9c/16/dd/96/4a/01/CD00134799.pdf/files/CD00134799.pdf/jcr:content/translations/en.CD00134799.pdf, Height=1mm, Lead Free=Yes, Mag Sense Range="49.152gauss (g)", Manufacturer Part Number=LSM303AGRTR, Mouser Description="IMUs - Inertial Measurement Units Ultra-compact high-performance e-compass 3D accelerometer and 3D magnetometer module", Octopart=https://octopart.com/lsm303agrtr-stmicroelectronics-59386630, Resolution=16bits, RoHS=TRUE, Sensor Output=I2C,SPI, Sensor Type=Temperature,Accelerometer,Magnetometer
U5 U6: library part CMP-010-00026-1, "Piezoresistive Sensor, Absolute, 0Psi Min, 30Psi Max, 0.25%, 0.20-0.80V, Square, Board Mount", Max Operating Temperature=85°C, Max Supply Voltage=3.6V, Min Operating Temperature=-40°C, Min Supply Voltage=1.8V
U8: library part CMP-12177-000010-1, "INEMO INERTIAL MODULE: 3D ACCELE", Manufacturer=STMicroelectronics, Max Supply Voltage=3.6V, Min Supply Voltage=1.62V, Operating Supply Current=0.55mA, Package=LGA-14L-DM00249496, Temperature="-40°C to +85°C", Temperature Range High=+85°C, Temperature Range Low=-40°C, Accel Range=2/4/8/16g, Accel Sensitivity=0.061/0.122/0.244/0.488mV/g, Automotive=No, Category=IC, ComponentLink2Description=Datasheet, ComponentLink2URL=https://www.st.com/resource/en/datasheet/lsm6dsox.pdf, Device Class L1=Sensors, Device Class L2="Motion Sensors", Device Class L3="Inertial Measurement Units (IMUs)", Digikey Description="INEMO INERTIAL MODULE: 3D ACCELE", Footprint Url=https://www.st.com/content/ccc/resource/technical/document/technical_note/73/17/9c/16/dd/96/4a/01/CD00134799.pdf/files/CD00134799.pdf/jcr:content/translations/en.CD00134799.pdf, Gyro Range=125/250/500/1000/2000°/s, Gyro Sensitivity=4.375/8.75/17.5/35/70LSB/°/s, Height=0.86mm, Lead Free=Yes, Manufacturer Part Number=LSM6DSOXTR, Mouser Description="LSM6DSOX: 3.6 V 3 Axis Accelerometer Gyroscope iNEMO Inertial Module - LGA-14L", Octopart=https://octopart.com/lsm6dsoxtr-stmicroelectronics-98102600, RoHS=TRUE, Sensor Output=I2C,SPI,Other, Sensor Type=Temperature,Accelerometer,Gyroscope
Y1: library part CMP-27762-011048-1, "Crystal 32MHz ±30ppm 10pF SMD-4 2.5mm x 2mm Automotive", Case/Package=SMD/SMT, ESR (Equivalent Series Resistance)=80R, Frequency=32MHz, Frequency Stability=100ppm, Frequency Tolerance=30ppm, Load Capacitance=10pF, Max Operating Temperature=125°C, Min Operating Temperature=-40°C, Ratings=AEC-Q200, Height=0.024inch, Length=0.098inch, Mount="Surface Mount", Packaging="Tape and Reel", RoHS Compliant=Yes, Width=0.079inch
Y2: library part CMP-00572-106941302-3, "Crystal ROHS3Compliant Enable/Disable Active Oscillator -20C~70C 47mA 0.055 1.40mm 100MHz", Case/Package=CLCC, Max Input Voltage=3.465V, Max Operating Temperature=70°C, Max Output Frequency=999.9MHz, Min Input Voltage=3.135V, Min Operating Temperature=-20°C, ComponentLink1Description="Manufacturer's Website", ComponentLink1URL=http://www.renesas.com, ComponentLink2Description="Datasheet URL", ComponentLink2URL=https://octopart.com/cad-content/api/get-model-datasheet/15189/106941302, ComponentLink3Description="Manufacturer's Package Drawing", ComponentLink3URL=https://www.renesas.com/en/document/psc/ju6-package-outline-70-x-50-mm-body-13-mm-thick, Height=1.45mm, HelpURL=https://octopart.com/cad-content/api/get-model-datasheet/15189/106941302, Mount="Surface Mount", Number of Pins=6, Output Type=LVCMOS, RoHS=Compliant

## Via types
v1: diameter 50, hole 28, Top Layer to Bottom Layer, 68 vias
v2: diameter 19.68, hole 7.87, Top Layer to Bottom Layer, 16 vias

## Nets (pads, with @x,y where several pads share a name; then routed paths per layer and width w, separated by ;. In a path a pad name is that pad's centre, name@x,y a point inside that pad or via, vN(x,y) a via of type N, cw(c..) or ccw(c..) an arc to the next point about the centre after c; other vN are vias at no path point)
GND: *.4 C1.2 C1_2.1 C2.2 C2_2.1 C4.1@3887.72,3370 C6.2 C7.2 C8.2 C9.2 C10.2 LED3.1 MD7.2 MD7.10 MD7.12 MD7.13 MD7.24 R2.2 R4.2 U1.2 U1.4 U1A.A11 U1A.B11 U2.2 U2.4 U2.D1 U2.E6 U3.2 U3.8 U3.9 U4.6 U4.8 U5.10 U6.10 U8.1 U8.6 U8.7 Y2.3 | length 14689.2
  Top Layer w10: LED3.1 1666.91,3387.09 ; U3.9 v1(1895,2593.47) 1895,3159 ; v1(2054,3000) 1895,3159 ; U6.10 2852.54,2513.46 v1(2876,2490) ; v1(3498,2528.46) U5.10 3536,2604.46 3536,2926 3560,2950 *.4 3709,2950 3737,2922 3960,2922 ; v1(3957.72,3471) 4020,3533.28 ; Y2.3 4020,3533.28 ; v1(4357,2928) v1@4341.89,2943.11 ; U2.E6 4404.53,2943.11 v1@4341.89,2943.11 ; U1.2 U1.4 ; v1(6092.28,2408) 6264.41,2580.13 MD7.13 MD7.12 6264.41,3257 6340,3257 6351.02,3245.98 ; MD7.10 6351.02,3245.98 ; U2.2 U2.4 6815.59,1970.59 MD7.24 6815.59,2948 6772.28,2991.31 MD7.2 6772.28,3244.72 6760,3257 6351.02,3257 6351.02,3245.98 ; 1666.91,3387.09 1840,3387.09 1895,3332.09 1895,3159 ; 1666.91,3387.09 1895,3159 ; 3960,2922 4024.89,2922 4046,2943.11 U2.D1 v1@4341.89,2943.11 ; 3960,2922 3978,2940 3978,3483 4020,3525 4020,3533.28
  GND w10: v1(2992.28,2433) 3060.28,2501 v1(3536,2501)
  SRAM_Bus w10: v1(4342,2203) U1.4
  Bottom Layer w10: v1(2054,3000) C1_2.1 2105,2857.28 2160,2802.28 C2_2.1 2200,2654.28 2217.28,2637 2217.28,2551 ; C1.2 2217.28,2551 ; R2.2 2541.3,2525.7 ; v1(2876,2490) C7.2 ; v1(2992.28,2433) C7.2 ; v1(3498,2528.46) 3536.46,2490 v1@3547,2490 ; v1(3536,2501) v1@3547,2490 ; C6.2 v1@3547,2490 ; C4.1@3887.72,3370 3887.72,3401 v1(3957.72,3471) ; v1(4293.46,2650.72) 4395,2549.18 ; v1(4342,2203) 4342,2480 4372.43,2510.43 C10.2 C10.2@4395,2516 ; v1(4357,2928) 4395,2890 4395,2549.18 ; v1(5070,2408.46) 5017.28,2461.18 C2.2 5017.28,2516 ; R4.2 5561.3,2559 5506.3,2614 ; C8.2 5907.28,2510 5917.28,2520 5965,2520 ; v1(6092.28,2408) C9.2 6025,2490 5995,2520 5965,2520 ; 2217.28,2551 2313.21,2646.93 2420.07,2646.93 2541.3,2525.7 ; 2541.3,2525.7 2669.6,2654 2938.28,2654 2992.28,2600 C7.2 ; C10.2@4395,2516 5017.28,2516 ; C10.2@4395,2516 4395,2549.18 ; 5017.28,2516 5017.28,2574.28 5057,2614 5506.3,2614 ; 5506.3,2614 5871,2614 5965,2520
Net32_1: 32.1 U1A.U11 | length 93.2
  Bottom Layer w10: 32.1 4567.19,3375 v1(4588.19,3354)
Net*_1: *.1 R33.1 U1A.K19 | length 1459.8
  Top Layer w10: v1(3553,3100) *.1
  GND w10: v1(3553,3100) 3608,3155 v1(4635,3155)
  Bottom Layer w10: v1(4635,3155) 4635,3355.09 ; R33.1 4635,3355.09 ; v1(4680,3291.81) 4680,3310.09 4635,3355.09
Net*_2: *.2 R37.2@3315,3413.7 | length 687.4
  Top Layer w10: *.2 3638,3050 v1(3658,3070)
  SRAM_Bus w10: v1(3554.3,3413.7) 3554.3,3173.7 v1(3658,3070)
  Bottom Layer w10: R37.2@3315,3413.7 v1(3554.3,3413.7)
Net*_3: *.3 R35.1 R38.2 | length 2602.8
  Top Layer w10: v1(3553.19,3000) *.3
  GND w10: v1(3129.3,3413.7) 3299,3244 3589,3244 ; v1(3553.19,3000) 3513,3040.19 3513,3168 3589,3244 ; v1(5148,3398) 4860,3398 4706,3244 3589,3244
  Bottom Layer w10: R38.2 v1(3129.3,3413.7) ; R35.1 5126.3,3376.3 v1(5148,3398)
Net*_5: *.5 R27.2 | length 2221.9
  Top Layer w10: *.5 3845,2950 v1(3902,3007)
  Power w10: v1(3902,3007) 5247,3007 v1(5653.7,3413.7)
  Bottom Layer w10: v1(5653.7,3413.7) R27.2
Net*_6: *.6 U1A.C11 | length 51.7
  Top Layer w10: v1(3733.5,3000) *.6
Net*_7: *.7 R34.1 R39.2 | length 2671.6
  Top Layer w10: *.7 v1(3836.81,3050)
  Power w10: v1(3836.81,3050) 4037.81,3251 v1(4865,3251)
  GND_2 w10: v1(2722,3413.7) 3075.7,3060 3571,3060 3606,3025 3694,3025 3719,3050 v1(3836.81,3050)
  Bottom Layer w10: R39.2 v1(2722,3413.7) ; v1(4865,3251) R34.1
NetC2_1: C2.1 U4.5 | length 145.3
  Bottom Layer w10: C2.1 5052.72,2543.26 5081,2571.54 v1(5133,2571.54)
NetC3_1: C3.1 C4.2@5202.28,2490 C5.2 | length 735.3
  GND w10: v1(4890,2441) 4914,2465 v1(5150,2465)
  Bottom Layer w10: C5.2 4837.28,2463.72 4860,2441 v1(4890,2441) ; v1(5150,2465) 5190,2465 5202.28,2477.28 5202.28,2490 5202.28,2518.28 5434.72,2518.28 5443,2510 5443,2500 5433,2490 C3.1
NetC12_1: Y1.2
NetC13_1: Y1.4
NetC14_2: L1.2
NetC15_2: L1.1 LoRa1.27 | length 820.2
  Top Layer w10: L1.1 5590.87,4280 5613.87,4303 5740.82,4303 6138.82,3905 LoRa1.27
NetC16_2: P3.1
NetD1_1: 
NetLED3_2: LED3.2 R40.1 | length 804.3
  Top Layer w10: LED3.2 2264.09,3422.91 v1(2310.7,3376.3)
  Bottom Layer w10: v1(2310.7,3376.3) R40.1
NetLoRa1_5: LoRa1.5 Y1.1 | length 531.6
  Top Layer w10: Y1.1 5937.41,3800 6043,3694.41 LoRa1.5
NetLoRa1_6: LoRa1.6 Y1.3 | length 630.8
  Top Layer w10: Y1.3 5529.88,3669 5530.06,3668.82 LoRa1.6
NetLoRa1_7: LoRa1.7
NetLoRa1_8: LoRa1.8
NetLoRa1_16: LoRa1.16
NetLoRa1_17: LoRa1.17
NetLoRa1_18: LoRa1.18
NetLoRa1_19: LoRa1.19
NetMD7_7: MD7.7 R8.1 | length 1119.8
  Top Layer w10: v1(6555.75,3141) MD7.7
  Power w10: v1(5852,2495) 6498,3141 v1(6555.75,3141)
  Bottom Layer w10: R8.1 v1(5852,2495)
NetMD7_18: MD7.18 R6.2 U3.1 U4.4 U5.2 U6.2 U8.14 | length 5109.7
  Top Layer w10: v1(2041.3,2546.3) 2141.93,2646.93 2715,2646.93 2758,2603.93 ; U6.2 2758,2603.93 ; v1(3403,2681) 3403,2618.93 ; U5.2 3403,2618.93 ; MD7.18 v1(6555.75,2668.35) v1(6555.75,2668.35) v1(6556,2668) ; 2758,2603.93 2758,2626 2770,2638 3383.93,2638 3403,2618.93
  GND w10: v1(3403,2681) 3412.72,2690.72 4323.74,2690.72 4333.46,2681 6543,2681 v1(6556,2668)
  Bottom Layer w10: v1(1800.81,2496) 1801,2495 R6.2 v1(2041.3,2546.3)
NetMD7_19: MD7.19 R5.2 U3.4 U4.1 U5.3 U6.3 U8.13 | length 5869.6
  Top Layer w10: v1(2371.3,2546.93) v1@2744.07,2546.93 ; v1(2744,2547) v1@2744.07,2546.93 ; U6.3 v1@2744.07,2546.93 ; v1(3375,2547) v1@3389.93,2561.93 ; v1(3388.66,2561.93) v1@3389.93,2561.93 ; U5.3 v1@3389.93,2561.93 ; v1(6599.06,2610) MD7.19
  GND w10: v1(2371.3,2577) 4509,2577 4568,2518 5155,2518 5247,2610 v1(6599.06,2610) ; v1(2744,2547) v1(3375,2547)
  Bottom Layer w10: v1(2130.81,2496) 2170.81,2456 2304.38,2456 2343.38,2495 R5.2 v1(2371.3,2546.93) v1(2371.3,2577)
NetP1_1: 
NetP2_1: 
NetP4_1: 
NetP4_2: 
NetP4_3: 
NetP4_4: 
NetP5_1: 
NetP5_2: 
NetP6_1: 
NetP6_2: 
NetR1_1: R1.1 U1.1 | length 674.1
  Power w10: v1(4660,1275) U1.1
  Bottom Layer w10: R1.1 v1(4660,1275)
NetR3_1: R3.1 U2.1 | length 3766.1
  GND_2 w10: v1(4077,2495) 4077,1498 4120,1455 U2.1
  Bottom Layer w10: R3.1 v1(4077,2495)
NetR7_1: R7.1 U3.6 | length 129.3
  Bottom Layer w10: R7.1 2059.49,2185 2114.49,2240 v1(2114.49,2262)
NetR10_2: 
NetR12_1: 
NetR13_1: 
NetR14_1: 
NetR27_1: R27.1 U1A.D18 | length 99
  Bottom Layer w10: R27.1 5815,3350.09 5850,3315.09 v1(5850,3291.81)
NetR30_1: R30.1 R40.2 U1A.U12 | length 1961.6
  GND w10: v1(2395,3456) 3002,3456 3084,3538 3779,3538 v1(4025,3292)
  Bottom Layer w10: R40.2 v1(2395,3456) ; v1(4025,3292) 4025,3348.09 ; R30.1 4025,3348.09 ; v1(4056,3291.81) 4056,3317.09 4025,3348.09
NetR31_1: R31.1 U1A.V10 | length 99
  Bottom Layer w10: R31.1 4255,3326.81 v1(4290,3291.81)
NetR37_2: R37.2@2855,3413.7 U1A.V11 | length 97.3
  Bottom Layer w10: R37.2@2855,3413.7 2855,3467.19 v1(2886,3498.19)
NetU1C_L17: U1C.L17 Y2.4 | length 69.4
  Top Layer w10: Y2.4 v1(4020,4227.05)
NetU1D_R2: 
NetU1D_R3: 
NetU1D_T1: 
NetU1D_T2: 
NetU1D_T3: 
NetU1D_U1: 
NetU1D_U2: 
NetU1D_U3: 
NetU1D_U4: 
NetU1D_U5: 
NetU1D_U7: 
NetU1D_U8: 
NetU1D_V2: 
NetU1D_V3: 
NetU1D_V4: 
NetU1D_V5: 
NetU1D_V7: 
NetU1D_V8: 
NetU1D_W2: 
NetU1D_W3: 
NetU1D_W4: 
NetU1D_W5: 
NetU1D_W6: 
NetU1D_W7: 
NetU2_B3: U2.B3
NetU2_G2: U2.G2
NetU2_G3: U2.G3
NetU9_5: 
NetU9_6: 
NetU9_7: 
NetU9_10: 
NetU9_11: 
NetU9_12: 
NetU10_1: 
NetU10_7: 
NetU10_8: 
QSPI_DQ1: R37.1@3315,3376.3 U1A.D19 | length 100.6
  Bottom Layer w10: R37.1@3315,3376.3 3315,3330.81 v1(3354,3291.81)
QSPI_DQ2: R38.1 U1A.G18 | length 99
  Bottom Layer w10: R38.1 3085,3326.81 v1(3120,3291.81)
QSPI_DQ3: R39.1 U1A.F18 | length 95.7
  Bottom Layer w10: R39.1 2625,3318.81 v1(2652,3291.81)
SRAM-A0: U2.A1
SRAM-A1: U2.A2
SRAM-A2: U2.B2
SRAM-A3: U2.A4
SRAM-A4: U2.B4
SRAM-A5: U2.C4
SRAM-A6: U2.A5
SRAM-A7: U2.B5
SRAM-A8: U2.A6
SRAM-A9: U2.H1
SRAM-A10: U2.H2
SRAM-A11: U2.H3
SRAM-A12: U2.H4
SRAM-A13: U2.H5
SRAM-A14: U2.H6
SRAM-A15: U2.G5
SRAM-A16: U2.G4
SRAM-A17: U2.F4
SRAM-A18: U2.F3
SRAM-DQ0: U2.B6
SRAM-DQ1: U2.C6
SRAM-DQ2: U2.F6
SRAM-DQ3: U2.G6
SRAM-DQ4: U2.B1
SRAM-DQ5: U2.C1
SRAM-DQ6: U2.F1
SRAM-DQ7: U2.G1
VCC: MD7.22 R8.2 | length 1236.5
  Top Layer w10: v1(6728.98,2536) MD7.22
  GND w10: v1(5731.3,2536) v1(6728.98,2536)
  Bottom Layer w10: R8.2 v1(5731.3,2536)
VCC3V3: 32.2 *.8 C1_2.2 C2_2.2 C4.2@3852.28,3370 R30.2 R31.2 R33.2 R34.2 R35.2 R37.1@2855,3376.3 U2.D6 U2.E1 Y2.1 Y2.6 | length 6082.5
  Top Layer w10: *.8 v1(3785.16,3370) ; v1(3820,3340) Y2.1 Y2.6 ; v1(4220,2855) 4278.58,2913.58 U2.E1 ; v1(4440,3416) 4455,3401 4455,2964.05 U2.D6 v1(4469.91,2943.11)
  Power w10: v1(2886,3323) 2933,3370 v1(3733,3370) ; v1(4220,2855) 4381.8,2855 v1(4469.91,2943.11)
  Bottom Layer w10: C1_2.2 2160,3035.43 ; C2_2.2 2200,2995.43 2160,3035.43 ; R37.1@2855,3376.3 2855,3354 ; v1(2886,3323) 2855,3354 ; v1(3733,3370) v1(3785.16,3370) 3820,3370 C4.2@3852.28,3370 ; v1(3820,3340) 3842.28,3340 3852.28,3350 C4.2@3852.28,3370 ; v1(4440,3416) v1@4440,3413.7 ; R35.2 R34.2 R33.2 4480,3413.7 4466.3,3400 4466.3,3395.4 ; 2160,3035.43 2810.43,3035.43 2855,3080 2855,3354 ; C4.2@3852.28,3370 3852.28,3560 3912.28,3620 3965,3620 4025,3560 R30.2 R31.2 v1@4440,3413.7 ; v1@4440,3413.7 4448,3413.7 4466.3,3395.4 ; v1@4440,3413.7 4440,3384 4449,3375 32.2 4466.3,3395.4
VCC_IO: C3.2 U4.10 | length 137.7
  Bottom Layer w10: C3.2 5387.28,2436.74 5415.57,2408.46 v1(5460,2408.46)
XADCGND: U1A.A12 U1A.A13 U1A.B12 U1A.B13
pads on no net: C1.1 C4.1@5237.72,2490 C5.1 C6.1 C7.1 C8.1 C9.1 C10.1 LoRa1.1 LoRa1.2 LoRa1.3 LoRa1.4 LoRa1.9 LoRa1.10 LoRa1.11 LoRa1.12 LoRa1.13 LoRa1.14 LoRa1.15 LoRa1.20 LoRa1.21 LoRa1.22 LoRa1.23 LoRa1.24 LoRa1.25 LoRa1.26 LoRa1.28 LoRa1.29 MD7.1 MD7.3 MD7.4 MD7.5 MD7.6 MD7.8 MD7.9 MD7.11 MD7.14 MD7.15 MD7.16 MD7.17 MD7.20 MD7.21 MD7.23 P3.2 R1.2 R2.1 R3.2 R4.1 R5.1 R6.1 R7.2 U1.3 U1A.A1 U1A.A2 U1A.A3 U1A.A4 U1A.A5 U1A.A6 U1A.A7 U1A.A8 U1A.A9 U1A.A10 U1A.A14 U1A.A15 U1A.A16 U1A.A17 U1A.A18 U1A.A19 U1A.B1 U1A.B2 U1A.B3 U1A.B4 U1A.B5 U1A.B6 U1A.B7 U1A.B8 U1A.B9 U1A.B10 U1A.B14 U1A.B15 U1A.B16 U1A.B17 U1A.B18 U1A.B19 U1A.C1 U1A.C2 U1A.C3 U1A.C4 U1A.C5 U1A.C6 U1A.C7 U1A.C8 U1A.C9 U1A.C10 U1A.C12 U1A.C13 U1A.C14 U1A.C15 U1A.C16 U1A.C17 U1A.C18 U1A.C19 U1A.D1 U1A.D2 U1A.D3 U1A.D17 U1A.E1 U1A.E2 U1A.E3 U1A.E17 U1A.E18 U1A.E19 U1A.F1 U1A.F2 U1A.F3 U1A.F17 U1A.F19 U1A.G1 U1A.G2 U1A.G3 U1A.G7 U1A.G8 U1A.G9 U1A.G10 U1A.G11 U1A.G12 U1A.G13 U1A.G17 U1A.G19 U1A.H1 U1A.H2 U1A.H3 U1A.H7 U1A.H8 U1A.H9 U1A.H10 U1A.H11 U1A.H12 U1A.H13 U1A.H17 U1A.H18 U1A.H19 U1A.J1 U1A.J2 U1A.J3 U1A.J7 U1A.J8 U1A.J9 U1A.J10 U1A.J11 U1A.J12 U1A.J13 U1A.J17 U1A.J18 U1A.J19 U1A.K1 U1A.K2 U1A.K3 U1A.K7 U1A.K8 U1A.K12 U1A.K13 U1A.K17 U1A.K18 U1A.L1 U1A.L2 U1A.L3 U1A.L7 U1A.L8 U1A.L9 U1A.L10 U1A.L11 U1A.L12 U1A.L13 U1A.L17 U1A.L18 U1A.L19 U1A.M1 U1A.M2 U1A.M3 U1A.M7 U1A.M8 U1A.M9 U1A.M10 U1A.M11 U1A.M12 U1A.M13 U1A.M17 U1A.M18 U1A.M19 U1A.N1 U1A.N2 U1A.N3 U1A.N7 U1A.N8 U1A.N9 U1A.N10 U1A.N11 U1A.N12 U1A.N13 U1A.N17 U1A.N18 U1A.N19 U1A.P1 U1A.P2 U1A.P3 U1A.P17 U1A.P18 U1A.P19 U1A.R1 U1A.R2 U1A.R3 U1A.R17 U1A.R18 U1A.R19 U1A.T1 U1A.T2 U1A.T3 U1A.T17 U1A.T18 U1A.T19 U1A.U1 U1A.U2 U1A.U3 U1A.U4 U1A.U5 U1A.U6 U1A.U7 U1A.U8 U1A.U9 U1A.U10 U1A.U13 U1A.U14 U1A.U15 U1A.U16 U1A.U17 U1A.U18 U1A.U19 U1A.V1 U1A.V2 U1A.V3 U1A.V4 U1A.V5 U1A.V6 U1A.V7 U1A.V8 U1A.V9 U1A.V12 U1A.V13 U1A.V14 U1A.V15 U1A.V16 U1A.V17 U1A.V18 U1A.V19 U1A.W1 U1A.W2 U1A.W3 U1A.W4 U1A.W5 U1A.W6 U1A.W7 U1A.W8 U1A.W9 U1A.W10 U1A.W11 U1A.W12 U1A.W13 U1A.W14 U1A.W15 U1A.W16 U1A.W17 U1A.W18 U1A.W19 U1C.A1 U1C.A2 U1C.A3 U1C.A4 U1C.A5 U1C.A6 U1C.A7 U1C.A8 U1C.A9 U1C.A10 U1C.A11 U1C.A12 U1C.A13 U1C.A14 U1C.A15 U1C.A16 U1C.A17 U1C.A18 U1C.A19 U1C.B1 U1C.B2 U1C.B3 U1C.B4 U1C.B5 U1C.B6 U1C.B7 U1C.B8 U1C.B9 U1C.B10 U1C.B11 U1C.B12 U1C.B13 U1C.B14 U1C.B15 U1C.B16 U1C.B17 U1C.B18 U1C.B19 U1C.C1 U1C.C2 U1C.C3 U1C.C4 U1C.C5 U1C.C6 U1C.C7 U1C.C8 U1C.C9 U1C.C10 U1C.C11 U1C.C12 U1C.C13 U1C.C14 U1C.C15 U1C.C16 U1C.C17 U1C.C18 U1C.C19 U1C.D1 U1C.D2 U1C.D3 U1C.D17 U1C.D18 U1C.D19 U1C.E1 U1C.E2 U1C.E3 U1C.E17 U1C.E18 U1C.E19 U1C.F1 U1C.F2 U1C.F3 U1C.F17 U1C.F18 U1C.F19 U1C.G1 U1C.G2 U1C.G3 U1C.G7 U1C.G8 U1C.G9 U1C.G10 U1C.G11 U1C.G12 U1C.G13 U1C.G17 U1C.G18 U1C.G19 U1C.H1 U1C.H2 U1C.H3 U1C.H7 U1C.H8 U1C.H9 U1C.H10 U1C.H11 U1C.H12 U1C.H13 U1C.H17 U1C.H18 U1C.H19 U1C.J1 U1C.J2 U1C.J3 U1C.J7 U1C.J8 U1C.J9 U1C.J10 U1C.J11 U1C.J12 U1C.J13 U1C.J17 U1C.J18 U1C.J19 U1C.K1 U1C.K2 U1C.K3 U1C.K7 U1C.K8 U1C.K12 U1C.K13 U1C.K17 U1C.K18 U1C.K19 U1C.L1 U1C.L2 U1C.L3 U1C.L7 U1C.L8 U1C.L9 U1C.L10 U1C.L11 U1C.L12 U1C.L13 U1C.L18 U1C.L19 U1C.M1 U1C.M2 U1C.M3 U1C.M7 U1C.M8 U1C.M9 U1C.M10 U1C.M11 U1C.M12 U1C.M13 U1C.M17 U1C.M18 U1C.M19 U1C.N1 U1C.N2 U1C.N3 U1C.N7 U1C.N8 U1C.N9 U1C.N10 U1C.N11 U1C.N12 U1C.N13 U1C.N17 U1C.N18 U1C.N19 U1C.P1 U1C.P2 U1C.P3 U1C.P17 U1C.P18 U1C.P19 U1C.R1 U1C.R2 U1C.R3 U1C.R17 U1C.R18 U1C.R19 U1C.T1 U1C.T2 U1C.T3 U1C.T17 U1C.T18 U1C.T19 U1C.U1 U1C.U2 U1C.U3 U1C.U4 U1C.U5 U1C.U6 U1C.U7 U1C.U8 U1C.U9 U1C.U10 U1C.U11 U1C.U12 U1C.U13 U1C.U14 U1C.U15 U1C.U16 U1C.U17 U1C.U18 U1C.U19 U1C.V1 U1C.V2 U1C.V3 U1C.V4 U1C.V5 U1C.V6 U1C.V7 U1C.V8 U1C.V9 U1C.V10 U1C.V11 U1C.V12 U1C.V13 U1C.V14 U1C.V15 U1C.V16 U1C.V17 U1C.V18 U1C.V19 U1C.W1 U1C.W2 U1C.W3 U1C.W4 U1C.W5 U1C.W6 U1C.W7 U1C.W8 U1C.W9 U1C.W10 U1C.W11 U1C.W12 U1C.W13 U1C.W14 U1C.W15 U1C.W16 U1C.W17 U1C.W18 U1C.W19 U2.3 U2.A3 U2.C3 U3.3 U3.5 U3.7 U4.2 U4.3 U4.7 U4.9 U4.11 U4.12 U5.1 U5.4 U5.5 U5.6 U5.7 U5.8 U5.9 U5.11 U5.12 U6.1 U6.4 U6.5 U6.6 U6.7 U6.8 U6.9 U6.11 U6.12 U8.2 U8.3 U8.4 U8.5 U8.8 U8.9 U8.10 U8.11 U8.12 Y2.2 Y2.5
copper on no net:
  other v2: 6125.04,3655.04 6168.35,3655.04 6211.65,3655.04 6254.96,3655.04 6125.04,3698.35 6168.35,3698.35 6211.65,3698.35 6254.96,3698.35 6125.04,3741.65 6168.35,3741.65 6211.65,3741.65 6254.96,3741.65 6125.04,3784.96 6168.35,3784.96 6211.65,3784.96 6254.96,3784.96

## Text inside footprints (layer, text, board x,y; h text height)
P3: Assembly Notes "Stencil thickness : 120 μm" at 1908,3776.3 h39.37
U1: Top Overlay "*" at 4619.01,1152.2 h60 r90
U2: Top Overlay "*" at 6504.01,1277.2 h60 r90